# Altium PCB bob_breakout-layout.PcbDoc (part 2 of 2)
Units mil, origin at the board's own origin, x right, y up, seen from the top; angles counter-clockwise.
Board outline 6141.73 x 4531.01 mil, 4 copper layers (Top Copper, Signal Layer 1, Signal Layer 2, Bottom Copper), stack 61.811 mil thick; 106 components, 121 nets, 504 pads, 390 vias.
Unrouted connection lines stored in the file: 19.
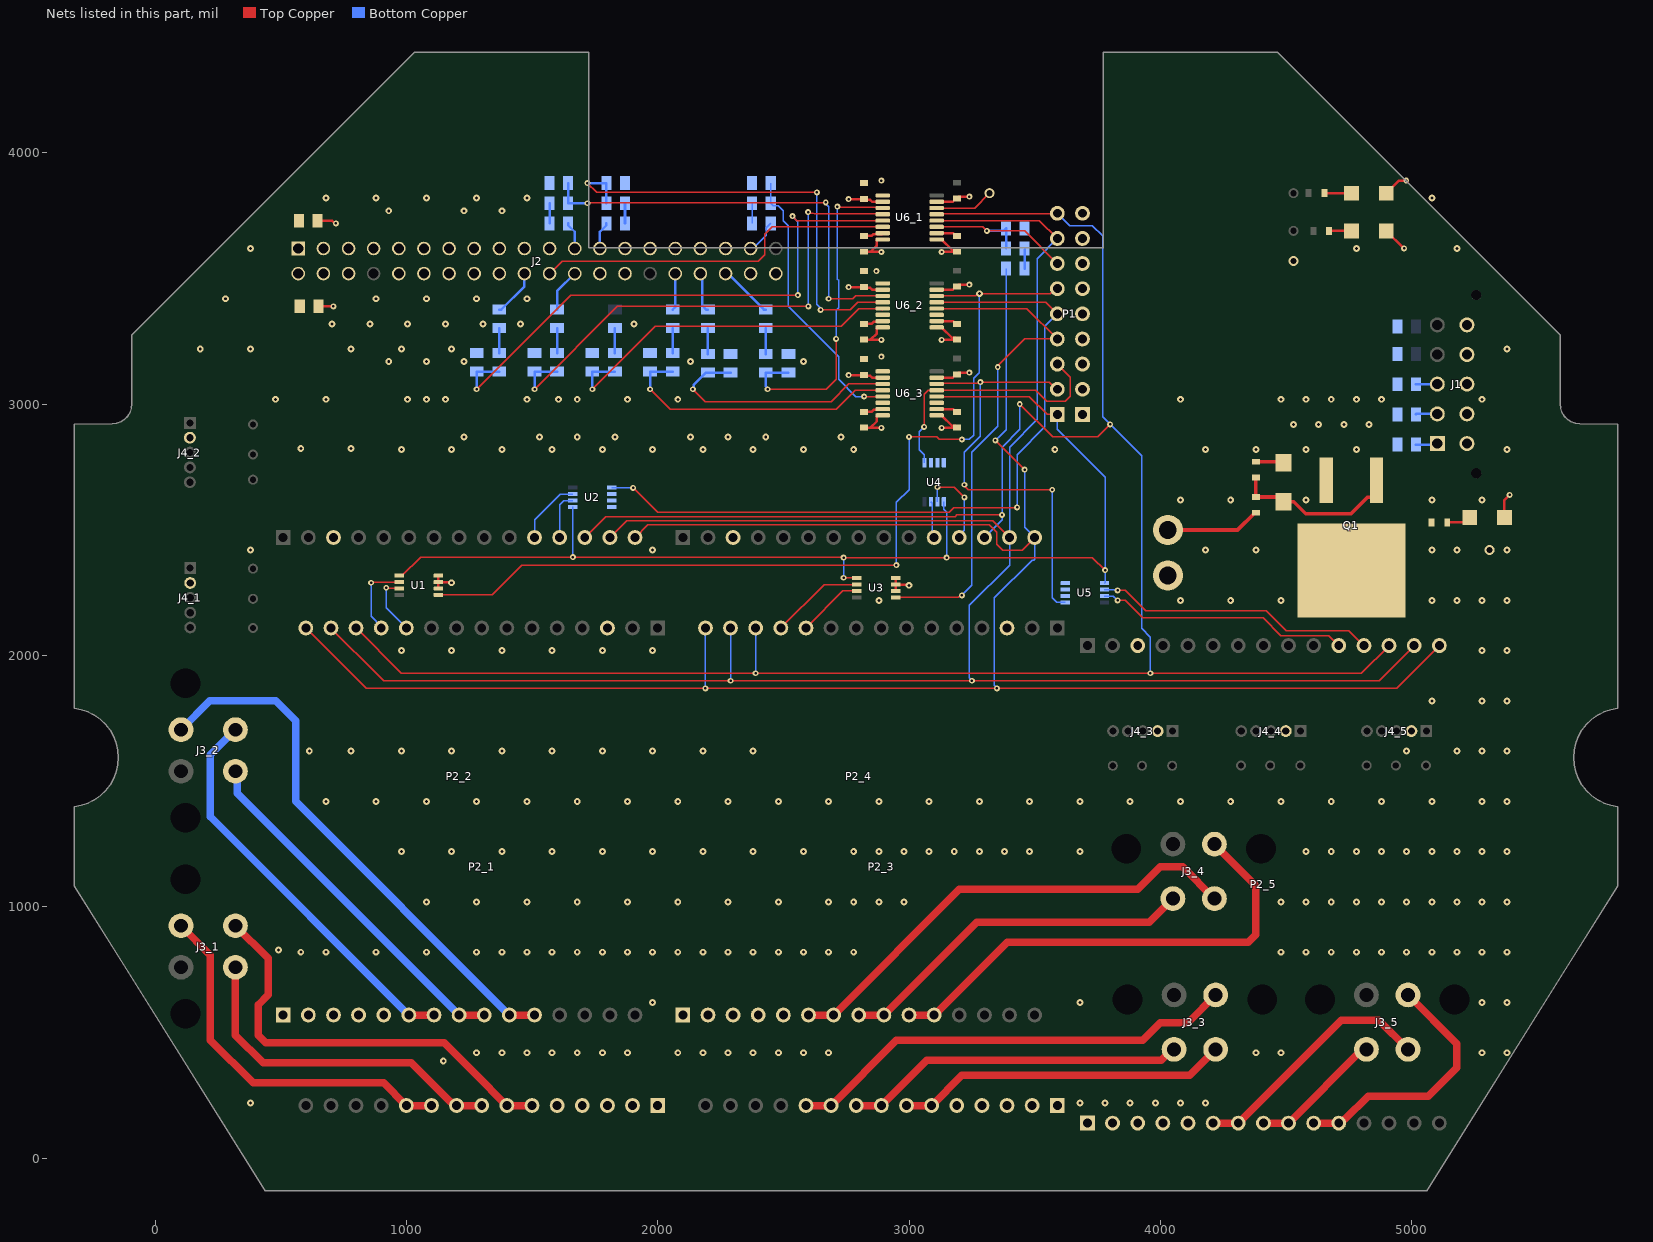
[diagram p4: the nets of this part, all layers, seen from the top]

## Via types
v1: diameter 27.56, hole 11.81, Top Copper to Bottom Copper, 156 vias
v2: diameter 27.56, hole 11.81, Top Copper to Bottom Copper, tented both sides, 141 vias
v3: diameter 23.62, hole 9.84, Top Copper to Bottom Copper, tented both sides, 93 vias

## Nets (pads, with @x,y where several pads share a name; then routed paths per layer and width w, separated by ;. In a path a pad name is that pad's centre, name@x,y a point inside that pad or via, vN(x,y) a via of type N, cw(c..) or ccw(c..) an arc to the next point about the centre after c; other vN are vias at no path point) (continued)
GND: C3.2 C4.2 C5.2 C6.2 C7.2 C9_1.1 C9_2.1 C9_3.1 D2.2 D3.2 D4.2 GND1.1 J1.6 J1.7 J1.8 J1.9 J1.10 J4_1.2 J4_2.2 J4_3.2 J4_4.2 J4_5.2 P1.2 P1.4 P1.6 P1.8 P1.10 P1.12 P1.14 P1.16 P1.18 P2_1.3 P2_1.18 P2_1.19 P2_1.20 P2_2.3 P2_2.18 P2_2.19 P2_2.20 P2_3.3 P2_3.18 P2_3.19 P2_3.20 P2_4.3 P2_4.18 P2_4.19 P2_4.20 P2_5.3 P2_5.18 P2_5.19 P2_5.20 R7_1.2 R7_2.2 R7_3.2 R10_4.2 S1.0 U1.2 U1.3 U1.4 U2.2 U2.3 U2.4 U3.2 U3.3 U3.4 U4.2 U4.3 U4.4 U5.2 U5.3 U5.4 U6_1.9 U6_1.15 U6_2.9 U6_2.15 U6_3.9 U6_3.15 | length 1408.7
  Top Copper w10: U1.2@1127.76,2267.2 U1.3@1127.76,2292.8 ; U1.4@1127.76,2318.39 U1.3@1127.76,2292.8 ; v2(1180,2290) 1178.6,2291.4 1129.15,2291.4 U1.3@1127.76,2292.8 ; U3.2@2947.76,2257.2 U3.3@2947.76,2282.8 ; U3.4@2947.76,2308.39 U3.3@2947.76,2282.8 ; v2(3000,2280) 2998.6,2281.4 2949.15,2281.4 U3.3@2947.76,2282.8 ; U6_3.9@3110,2956 3129.98,2956 3172.17,2913.82 3183.78,2913.82 R7_3.2@3190.59,2907.01 3190.09,2906.51 3130.5,2906.51 v3(3130,2906) ; U6_3.15@3110,3106 3174.15,3106 3186.65,3118.5 C9_3.1@3190.59,3118.5 3197.4,3125.31 3210.53,3125.31 3211.22,3126 v3(3240,3126) ; U6_2.9@3110,3306 3129.98,3306 3172.17,3263.82 3183.78,3263.82 R7_2.2@3190.59,3257.01 3190.09,3256.51 3130.5,3256.51 v3(3130,3256) ; U6_2.15@3110,3456 3174.15,3456 3186.65,3468.5 C9_2.1@3190.59,3468.5 3197.4,3475.31 3210.53,3475.31 3211.22,3476 v3(3240,3476) ; U6_1.9@3110,3656 3129.98,3656 3172.17,3613.82 3183.78,3613.82 R7_1.2@3190.59,3607.01 3190.09,3606.51 3130.5,3606.51 v3(3130,3606) ; U6_1.15@3110,3806 3174.15,3806 3186.65,3818.5 C9_1.1@3190.59,3818.5 3197.4,3825.31 3210.53,3825.31 3211.22,3826 v3(3240,3826) ; D3.2@4898.9,3690 4968.9,3620 v3(4970,3620) ; D2.2@4898.9,3840 4948.9,3890 v3(4978.4,3890) ; D4.2@5368.9,2550 5368.9,2618.9 v3(5390,2640)
  other v1: 1080,1020 1280,1020 1480,1020 1680,1020 1880,1020 2080,1020 2280,1020 2480,1020 980,1220 1180,1220 1380,1220 1580,1220 1780,1220 1980,1220 2180,1220 2380,1220 2580,1220 2780,1220 680,1420 880,1420 1080,1420 1280,1420 1480,1420 1680,1420 1880,1420 2080,1420 2280,1420 2480,1420 2680,1420 2880,1420 3080,1420 3280,1420 3480,1420 3680,1420 3880,1420 4080,1420 4280,1420 4480,1420 4680,1420 4880,1420 5080,1420 613.78,1620 780,1620 980,1620 1180,1620 1380,1620 1580,1620 1780,1620 1980,1620 2180,1620 2380,1620 4980,1620 5080,1820 980,2020 1180,2020 1380,2020 1580,2020 1780,2020 1980,2020 2880,2220 4080,2220 4280,2220 4480,2220 380,2420 1980,2420 4180,2420 4380,2420 4080,2620 4280,2620 980,2820 3580,2820 4180,2820 4380,2820 5380,2820 580,2824.28 780,2824.28 480,3020 680,3020 4080,3020 5280,3020 180,3220 380,3220 5380,3220 280,3420 380,3620 4780,3620 5180,3620 5080,3820
GPIO_PE6: J2.34 R8_9.2 | length 159.8
  Bottom Copper w10: J2.34@2170,3520 2177.5,3512.5 2177.5,3392 2192.5,3377 R8_9.2@2200,3377
GPIO_PZ0: J2.32 R8_8.2 | length 147.1
  Bottom Copper w10: R8_8.2@2060,3377 2070,3387 J2.32@2070,3520
I2C_1_SCL: J2.27
I2C_1_SDA: J2.28
I2C_2_SCL: J2.06
I2C_2_SDA: J2.04
I2S_4_LRCK: J2.36 R8_1.2 | length 219.2
  Bottom Copper w10: J2.36@2270,3520 2279.5,3520 2422.5,3377 R8_1.2@2430,3377
I2S_4_SCLK: J2.11
I2S_4_SDIN: J2.37 R8_10.2 | length 139
  Bottom Copper w5: J2.37@2370,3620 2380,3620 2432.5,3672.5 2432.5,3702.5 R8_10.2@2450,3720
JETSON_3V3: C2.1 C8_1.2 C8_2.2 C8_3.2 J2.02 J2.18 U6_1.1 U6_2.1 U6_3.1
  other v2: 1230,2870 1530,2870 1680,2870 1830,2870 2130,2870 2280,2870 2430,2870 2730,2870 1005,3020 1155,3020 1605,3020 930,3170 1080,3170 1230,3170 2130,3170 2580,3170 705,3320 855,3320 1005,3320 1155,3320 1305,3320 1455,3320 1905,3320 930,3770 1230,3770 1380,3770
  other v3: 2890,3190 2870,3530 2890,3890
JETSON_5V: C1.1 J2.01 J2.03
JETSON_GND: C1.2 C2.2 C8_1.1 C8_2.1 C8_3.1 J2.05 J2.10 J2.13 J2.19 J2.26 J2.29 J2.33 J2.40 R6_1.2 R6_2.2 R6_3.2 R10_1.2 R10_2.2 R10_3.2 R10_5.2 R10_6.2 R10_7.2 R10_8.2 R10_9.2 R10_10.2 U6_1.2 U6_1.8 U6_2.2 U6_2.8 U6_3.2 U6_3.8 | length 1088.4
  Top Copper w10: C1.2@647,3730 705.25,3730 715.25,3720 v3(720,3720) ; C2.2@650,3390 v3(710,3390) ; v3(2760,3116) 2760.5,3116.51 2820.09,3116.51 C8_3.1@2820.59,3117.01 2823.98,3113.61 2845.48,3113.61 2853.09,3106 U6_3.2@2895.43,3106 ; v3(2760,3466) 2760.5,3466.51 2820.09,3466.51 C8_2.1@2820.59,3467.01 2823.98,3463.61 2845.48,3463.61 2853.09,3456 U6_2.2@2895.43,3456 ; v3(2760,3816) 2760.5,3816.51 2820.09,3816.51 C8_1.1@2820.59,3817.01 2823.98,3813.61 2845.48,3813.61 2853.09,3806 U6_1.2@2895.43,3806 ; v3(2890,2906) 2889.5,2906.51 2821.09,2906.51 R6_3.2@2820.59,2907.01 2846.44,2907.01 2871.89,2932.46 2871.89,2952.44 2875.45,2956 U6_3.8@2895.43,2956 ; v3(2890,3256) 2889.5,3256.51 2821.09,3256.51 R6_2.2@2820.59,3257.01 2846.44,3257.01 2871.89,3282.46 2871.89,3302.44 2875.45,3306 U6_2.8@2895.43,3306 ; v3(2890,3606) 2889.5,3606.51 2821.09,3606.51 R6_1.2@2820.59,3607.01 2846.44,3607.01 2871.89,3632.46 2871.89,3652.44 2875.45,3656 U6_1.8@2895.43,3656
  other v2: 1180,2820 1380,2820 1580,2820 1780,2820 1980,2820 2180,2820 2380,2820 2580,2820 2780,2820 1080,3020 1480,3020 1680,3020 1880,3020 2080,3020 780,3220 980,3220 1180,3220 880,3420 1080,3420 1280,3420 1480,3420 680,3820 880,3820 1080,3820 1280,3820 1480,3820
LCD_BL_PWM: J2.31
LCD_TE: J2.16
NetD1_2: D1.2 Q1.1 R1.2 R2.1 | length 667.1
  Top Copper w15: R1.2@4380,2708.5 R2.1@4380,2631.5 4470.89,2631.5 D1.2@4490,2612.38 4530.78,2612.38 4578.49,2564.67 4758.81,2564.67 4824.28,2630.14 4838.43,2630.14 4860,2651.72 Q1.1@4860,2698.03
NetD2_1: D2.1 R3.1 | length 108.1
  Top Copper w10: R3.1@4652.99,3840 D2.1@4761.1,3840
NetD3_1: D3.1 R4.1 | length 89.6
  Top Copper w10: R4.1@4671.5,3690 D3.1@4761.1,3690
NetD4_1: D4.1 R5.1 | length 97.9
  Top Copper w10: R5.1@5141.5,2530 5211.1,2530 D4.1@5231.1,2550
NetR2_2: R2.2 S1.1 | length 378.4
  Top Copper w10: R2.2@4376.06,2568.5 R2.2@4380,2568.5
  Top Copper w15: S1.1@4030,2500 4307.56,2500 R2.2@4376.06,2568.5
NetR6_1_1: R6_1.1 U6_1.7 | length 79.4
  Top Copper w10: R6_1.1@2820.59,3670 2851.34,3670 2858.91,3677.57 2892,3677.57 U6_1.7@2895.43,3681
NetR6_2_1: R6_2.1 U6_2.7 | length 79.4
  Top Copper w10: R6_2.1@2820.59,3320 2851.34,3320 2858.91,3327.57 2892,3327.57 U6_2.7@2895.43,3331
NetR6_3_1: R6_3.1 U6_3.7 | length 79.4
  Top Copper w10: R6_3.1@2820.59,2970 2851.34,2970 2858.91,2977.57 2892,2977.57 U6_3.7@2895.43,2981
NetR7_1_1: R7_1.1 U6_1.10 | length 85.1
  Top Copper w10: U6_1.10@3110,3681 3175.65,3681 3186.65,3670 R7_1.1@3190.59,3670
NetR7_2_1: R7_2.1 U6_2.10 | length 85.1
  Top Copper w10: U6_2.10@3110,3331 3175.65,3331 3186.65,3320 R7_2.1@3190.59,3320
NetR7_3_1: R7_3.1 U6_3.10 | length 85.1
  Top Copper w10: U6_3.10@3110,2981 3175.65,2981 3186.65,2970 R7_3.1@3190.59,2970
NetR8_1_1: R8_1.1 R9_1.2 | length 103
  Bottom Copper w10: R9_1.2@2430,3200 R8_1.1@2430,3303
NetR8_2_1: R8_2.1 R9_2.2 | length 99
  Bottom Copper w10: R9_2.2@1600,3204 R8_2.1@1600,3303
NetR8_3_1: R8_3.1 R9_3.2 | length 99
  Bottom Copper w10: R9_3.2@1370,3204 R8_3.1@1370,3303
NetR8_4_1: R8_4.1 R9_4.2 | length 80
  Bottom Copper w10: R8_4.1@3460,3540 R9_4.2@3460,3620
NetR8_5_1: R8_5.1 R9_5.2 | length 80
  Bottom Copper w10: R8_5.1@1570,3720 R9_5.2@1570,3800
NetR8_6_1: R8_6.1 R9_6.2 | length 80
  Bottom Copper w10: R8_6.1@1870,3720 R9_6.2@1870,3800
NetR8_7_1: R8_7.1 R9_7.2 | length 99
  Bottom Copper w10: R9_7.2@1830,3204 R8_7.1@1830,3303
NetR8_8_1: R8_8.1 R9_8.2 | length 99
  Bottom Copper w10: R9_8.2@2060,3204 R8_8.1@2060,3303
NetR8_9_1: R8_9.1 R9_9.2 | length 103
  Bottom Copper w10: R9_9.2@2200,3200 R8_9.1@2200,3303
NetR8_10_1: R8_10.1 R9_10.2 | length 80
  Bottom Copper w5: R8_10.1@2376,3720 R9_10.2@2376,3800
NetU6_2_6: U6_2.6
NetU6_2_11: U6_2.11
NetU6_3_6: U6_3.6
NetU6_3_11: U6_3.11
SPI_1_CS0: J2.23 R8_5.2 | length 110.8
  Bottom Copper w10: R8_5.2@1644,3720 1644,3712.5 1670,3686.5 J2.23@1670,3620
SPI_1_CS0_CTRL: P2_1.11 U1.7 | length 246.5
  Top Copper w5: v3(920,2270) 921.4,2268.6 970.85,2268.6 U1.7@972.24,2267.2
  Bottom Copper w5: v3(920,2270) 920,2190 P2_1.11@1000,2110
SPI_1_CS0_DRV: P2_1.12 U1.6 | length 304.2
  Top Copper w5: v3(860,2290) 862.31,2292.31 971.76,2292.31 U1.6@972.24,2292.8
  Bottom Copper w5: v3(860,2290) 860,2155.79 P2_1.12@900,2115.79
SPI_1_CS0_FILTER: R9_5.1 R10_5.1 U6_2.3 | length 1716.4
  Top Copper w5: v3(1720,3800) 1721.84,3801.84 2666.94,3801.84 v3(2668.78,3803.69) ; v3(2680,3420) 2776.95,3420 2787.96,3431 U6_2.3@2895.43,3431
  Top Copper w10: U6_2.3@2894.18,3429.75 U6_2.3@2895.43,3431
  Bottom Copper w5: v3(2668.78,3803.69) 2668.78,3797.59 2680,3786.37 v3(2680,3420)
  Bottom Copper w10: R10_5.1@1644,3880 R9_5.1@1644,3800 v3(1720,3800)
SPI_1_CS0_ISO: P1.11 U1.1 U6_2.14 | length 3734.7
  Top Copper w5: U1.1@1127.76,2241.61 1341.61,2241.61 1460,2360 v3(2950,2360) ; v3(3000,2870) 3110,2870 3120,2860 v3(3210,2860) ; U6_2.14@3110,3431 3264.9,3431 3273.9,3440 v2(3280,3440) 3561.78,3440 3581.78,3460 P1.11@3590,3460
  Bottom Copper w5: v3(2950,2360) 2950,2610 3000,2660 v3(3000,2870) ; v3(3210,2860) 3240,2860 3257.35,2877.35 3257.35,3103.43 3280,3126.07 v2(3280,3440)
SPI_1_CS1: J2.25 R8_6.2 | length 110.8
  Bottom Copper w10: J2.25@1770,3620 1770,3686.5 1796,3712.5 R8_6.2@1796,3720
SPI_1_CS1_CTRL: P2_2.11 U2.7 | length 264.8
  Bottom Copper w5: P2_2.11@1510,2470 1510,2540 1612.8,2642.8 U2.7@1662.24,2642.8
SPI_1_CS1_DRV: P2_2.12 U2.6 | length 189.4
  Bottom Copper w5: P2_2.12@1610,2470 1610,2600 1627.2,2617.2 U2.6@1662.24,2617.2
SPI_1_CS1_FILTER: R9_6.1 R10_6.1 U6_2.4 | length 1819
  Top Copper w5: v3(1720,3880) 1756.71,3843.29 v3(2633.41,3843.29) ; v3(2648.22,3375.67) 2765.67,3375.67 2796,3406 U6_2.4@2895.43,3406
  Bottom Copper w5: v3(2633.41,3843.29) 2632.34,3842.21 2632.34,3397.66 2648.22,3381.77 v3(2648.22,3375.67)
  Bottom Copper w10: v3(1720,3880) R10_6.1@1796,3880 R9_6.1@1796,3800
SPI_1_CS1_ISO: P1.9 U2.1 U6_2.13 | length 2996.6
  Top Copper w5: v3(1902.67,2667.33) 2000,2570 3160,2570 3177.51,2587.52 3427.51,2587.52 v3(3430,2590) ; U6_2.13@3110,3406 3544,3406 P1.9@3590,3360
  Bottom Copper w5: U2.1@1817.76,2668.39 1818.28,2667.86 1902.14,2667.86 v3(1902.67,2667.33) ; v3(3430,2590) 3430,2800 3540,2910 3540,3310 P1.9@3590,3360
SPI_1_CS2_CTRL: P2_3.11 U3.7 | length 260.9
  Top Copper w5: P2_3.11@2595.68,2110 2595.68,2115.68 2737.2,2257.2 U3.7@2792.24,2257.2
SPI_1_CS2_DRV: P2_3.12 U3.6 | length 373.8
  Top Copper w5: P2_3.12@2490,2110 2662.8,2282.8 U3.6@2792.24,2282.8
SPI_1_CS2_FILTER: R9_7.1 R10_7.1 U6_2.5 | length 1451.9
  Top Copper w5: v3(1740,3060) 1990,3310 2730,3310 2801,3381 U6_2.5@2895.43,3381
  Top Copper w10: U6_2.5@2892.93,3378.5 U6_2.5@2895.43,3381
  Bottom Copper w10: v3(1740,3060) R10_7.1@1740,3130 R9_7.1@1830,3130
SPI_1_CS2_ISO: P1.7 U3.1 U6_2.12 | length 2049.4
  Top Copper w5: U3.1@2947.76,2231.61 3196.58,2231.61 3204.96,2240 v3(3210,2240) ; U6_2.12@3110,3381 3469,3381 P1.7@3590,3260 3460,3260 3352.95,3152.95 v3(3352.95,3147.64)
  Bottom Copper w5: v3(3210,2240) 3250,2280 3250,2810 3352.95,2912.95 v3(3352.95,3147.64)
SPI_1_CS3_CTRL: P2_4.11 U4.7 | length 147.5
  Bottom Copper w5: U4.7@3087.2,2612.24 3092.97,2606.48 3092.97,2477.03 P2_4.11@3100,2470
SPI_1_CS3_DRV: P2_4.12 U4.6 | length 349.8
  Top Copper w5: v3(3112.8,2670) 3180,2670 v3(3220,2630)
  Bottom Copper w5: U4.6@3112.8,2612.24 v3(3112.8,2670) ; P2_4.12@3200,2470 3200,2478.22 3220,2498.22 v3(3220,2630)
SPI_1_CS3_FILTER: R9_8.1 R10_8.1 U6_3.4 | length 1150.1
  Top Copper w5: v3(1970,3060) 2050,2980 2710,2980 2786,3056 U6_3.4@2895.43,3056
  Bottom Copper w10: v3(1970,3060) R10_8.1@1970,3130 R9_8.1@2060,3130
SPI_1_CS3_ISO: P1.5 U4.1 U6_3.13 | length 1052.6
  Top Copper w5: v3(3060,2910) 3060,3040 3076,3056 U6_3.13@3110,3056 3504,3056 3547.2,3012.8 3622.04,3012.8 3641.42,3032.19 3641.42,3108.58 P1.5@3590,3160
  Bottom Copper w5: v3(3060,2910) 3040,2890 3040,2820 3061.61,2798.39 U4.1@3061.61,2767.76
SPI_1_CS4_CTRL: P2_5.11 U5.7 | length 1013.9
  Top Copper w5: v3(3830,2220) 3860,2220 3930,2150 4410,2150 4480,2080 4508.51,2080 cw(c4510,2040) 4511.49,2080 4608.51,2080 cw(c4610,2040) 4611.49,2080 4670,2080 P2_5.11@4710,2040
  Bottom Copper w5: U5.7@3777.76,2237.2 3812.8,2237.2 v3(3830,2220)
SPI_1_CS4_DRV: P2_5.12 U5.6 | length 1124.5
  Top Copper w5: v3(3830,2260) 3860,2260 3941.72,2178.28 4421.72,2178.28 4500,2100 4750,2100 P2_5.12@4810,2040
  Bottom Copper w5: U5.6@3777.76,2262.8 3779.15,2261.4 3828.6,2261.4 v3(3830,2260)
SPI_1_CS4_FILTER: R9_9.1 R10_9.1 U6_3.3 | length 992.6
  Top Copper w5: v3(2140,3060) 2190,3010 2690,3010 2761,3081 U6_3.3@2895.43,3081
  Top Copper w10: U6_3.3@2894.18,3079.75 U6_3.3@2895.43,3081
  Bottom Copper w10: v3(2140,3060) 2143.36,3063.36 2143.36,3076.86 2192.5,3126 R10_9.1@2290,3126
SPI_1_CS4_ISO: P1.3 U5.1 U6_3.14 | length 1780.6
  Top Copper w5: U6_3.14@3110,3081 3113.65,3084.66 3280.05,3084.66 v3(3283.71,3088.31) 3557.32,3088.31 3585.63,3060 P1.3@3590,3060 ; v3(3220,2680) 3220,2674.96 3234.96,2660 v3(3570,2660)
  Bottom Copper w5: v3(3220,2680) 3220,2810 3283.71,2873.71 v3(3283.71,3088.31) ; v3(3570,2660) 3570,2230 3588.39,2211.61 U5.1@3622.24,2211.61
SPI_1_CS5_FILTER: R9_1.1 R10_1.1 U6_1.3 | length 1325.8
  Top Copper w5: v3(2437.8,3060) 2670,3060 2710,3100 v3(2710,3260) ; v3(2714.92,3786.39) 2717.61,3783.7 2890.24,3783.7 U6_1.3@2894.18,3779.75
  Top Copper w10: U6_1.3@2894.18,3779.75 U6_1.3@2895.43,3781
  Bottom Copper w5: R10_1.1@2520,3126 R10_1.1@2521,3125 ; v3(2710,3260) 2710,3374.35 2720,3384.35 2720,3492.6 2714.92,3497.68 v3(2714.92,3786.39)
  Bottom Copper w10: v3(2437.8,3060) 2437.8,3064.75 2430,3072.56 R9_1.1@2430,3126 R10_1.1@2520,3126
SPI_1_CS5_ISO: CS5.1 U6_1.14 | length 234.4
  Top Copper w5: U6_1.14@3110,3781 3261,3781 CS5.1@3320,3840
SPI_1_MISO: J2.22 U6_1.6 | length 1449.3
  Top Copper w5: J2.22@1570,3520 1620,3570 2400,3570 2425.94,3595.94 2425.94,3604.08 2425.94,3675.94 2456,3706 U6_1.6@2895.43,3706
SPI_1_MISO_FILTER: P1.13 R9_4.1 R10_4.1 U6_1.11 | length 700.6
  Top Copper w5: U6_1.11@3110,3706 3294,3706 v3(3310,3690) 3460,3690 P1.13@3590,3560
  Bottom Copper w10: v3(3310,3690) 3376,3690 R10_4.1@3386,3700 R9_4.1@3386,3620
SPI_1_MISO_ISO: P2_1.15 P2_2.15 P2_3.15 P2_4.15 P2_5.15 R8_4.2 | length 8474
  Top Copper w5: P2_1.15@600,2110 840,1870 4940,1870 P2_5.15@5110,2040 ; P2_2.15@1910,2470 1960,2520 3320.17,2520 3350,2490.17 3350,2443.39 3373.39,2420 3450,2420 P2_4.15@3500,2470 ; v3(3343.8,2856.49) 3343.8,2856.35 3460,2740.15 v3(3460,2740)
  Bottom Copper w5: P2_3.15@2170.77,2129.23 P2_3.15@2190,2110 v3(2190,1870) ; v3(3343.8,2856.49) 3360.34,2873.03 3386,2898.69 R8_4.2@3386,3540 ; v3(3350,1870) 3350,1872.24 3340,1882.24 3340,2230 3490,2380 3497.07,2380 3500,2382.93 P2_4.15@3500,2470 3460,2510 v3(3460,2740)
SPI_1_MOSI: J2.20 R8_3.2 | length 188.8
  Bottom Copper w10: R8_3.2@1370,3377 1377.5,3377 1470,3469.5 J2.20@1470,3520
SPI_1_MOSI_FILTER: R9_3.1 R10_3.1 U6_1.5 | length 2282.9
  Top Copper w5: v3(1280,3060) 1654.33,3434.33 v3(2558.22,3434.33) ; v3(2536.44,3748.66) 2554.1,3731 U6_1.5@2895.43,3731
  Bottom Copper w5: v3(2536.44,3748.66) 2558.22,3726.88 v3(2558.22,3434.33)
  Bottom Copper w10: v3(1280,3060) R10_3.1@1280,3130 R9_3.1@1370,3130
SPI_1_MOSI_ISO: P1.15 P2_1.14 P2_2.14 P2_3.14 P2_4.14 P2_5.14 U6_1.12 | length 8757
  Top Copper w5: P2_1.14@682.32,2127.68 910,1900 4870,1900 P2_5.14@5010,2040 ; P2_2.14@1810,2470 1877.12,2537.12 3332.88,2537.12 P2_4.14@3400,2470 ; U6_1.12@3110,3731 3519,3731 P1.15@3590,3660
  Bottom Copper w5: v3(2290,1900) P2_3.14@2290,2112.9 ; v3(3250,1900) 3250,1902.24 3240,1912.24 3240,2200 3400,2360 P2_4.14@3400,2470 3400,2830 3510,2940 3510,3580 P1.15@3590,3660
SPI_1_MUX_SEL_FILTER: R9_10.1 R10_10.1 U6_3.5 | length 1107.6
  Top Copper w5: v3(2821,3031) U6_3.5@2895.43,3031
  Bottom Copper w5: R10_10.1@2450,3880 R9_10.1@2450,3800 2460,3790 2480,3790 2500,3770 2500,3730 2520,3710 2520,3390 2720,3190 2720,3100 2789,3031 v3(2821,3031)
SPI_1_MUX_SEL_ISO: P1.1 U1.5 U2.5 U3.5 U4.5 U5.5 U6_3.12 | length 4680
  Top Copper w5: U1.5@972.24,2318.39 982.68,2318.39 1056.54,2392.24 v3(1662.24,2392.24) 1663.37,2391.12 2738.88,2391.12 v3(2740,2390) v3(3150,2390) 3730,2390 v3(3780,2340) ; v3(2740,2310) 2740.81,2309.19 2791.44,2309.19 U3.5@2792.24,2308.39 ; U6_3.12@3110,3031 3479,3031 3550,2960 P1.1@3590,2960
  Bottom Copper w5: v3(1662.24,2392.24) U2.5@1662.24,2591.61 ; v3(2740,2310) v3(2740,2390) ; U4.5@3138.39,2612.24 3138.39,2581.61 3150,2570 v3(3150,2390) ; P1.1@3590,2960 3590,2900 3780,2710 v3(3780,2340) 3780,2290.63 U5.5@3777.76,2288.39
SPI_1_SCK: J2.24 R8_2.2 | length 172
  Bottom Copper w10: R8_2.2@1600,3377 1600,3450 J2.24@1670,3520
SPI_1_SCK_FILTER: R9_2.1 R10_2.1 U6_1.4 | length 2062.9
  Top Copper w5: v3(1510,3060) 1840,3390 v3(2600,3390) ; v3(2598.43,3764.86) 2602.74,3760.54 2619.66,3760.54 2622.21,3758 2893.44,3758 U6_1.4@2895.43,3756
  Bottom Copper w5: v3(2598.43,3764.86) 2599.21,3764.07 2599.21,3390.79 v3(2600,3390)
  Bottom Copper w10: v3(1510,3060) R10_2.1@1510,3130 R9_2.1@1600,3130
SPI_1_SCK_ISO: P1.17 P2_1.13 P2_2.13 P2_3.13 P2_4.13 P2_5.13 U6_1.13 | length 9648.3
  Top Copper w5: P2_1.13@800,2110 980,1930 4800,1930 P2_5.13@4910,2040 ; P2_2.13@1710,2470 1793,2553 3183,2553 3190,2560 v3(3370,2560) ; U6_1.13@3110,3756 3112,3758 3588,3758 P1.17@3590,3760 ; v3(3440.63,3000.78) 3571.42,2870 3750,2870 v3(3800,2920)
  Bottom Copper w5: v3(2390,1930) P2_3.13@2390,2110 ; P2_4.13@3300,2470 3370,2540 v3(3370,2560) 3370,2830 3440.63,2900.63 v3(3440.63,3000.78) ; P1.17@3590,3760 3640,3710 3730,3710 3770,3670 3770,2950 v3(3800,2920) 3925.67,2794.33 3925.67,2108.22 3960,2073.89 v3(3960,1930)
SPI_2_CS0: J2.17
SPI_2_CS1: J2.15
SPI_2_MISO: J2.21
SPI_2_MOSI: J2.38
SPI_2_SCK: J2.14
U_1: J3_1.1 P2_1.21 P2_1.22 | length 1720.6
  Top Copper w30: J3_1.1@320,925.35 450,795.35 450,650 410,610 410,490 440,460 1150,460 1272.22,337.78 1398.11,211.89 P2_1.22@1409.61,211.89 ; P2_1.22@1400,210 P2_1.21@1500,210
U_2: J3_2.1 P2_2.21 P2_2.22 | length 1604
  Top Copper w30: P2_2.21@1010,570 P2_2.22@1110,570
  Bottom Copper w30: J3_2.1@320,1705.35 220,1605.35 220,1360 P2_2.21@1010,570
U_3: J3_3.1 P2_3.21 P2_3.22 | length 1322.6
  Top Copper w30: P2_3.22@2990,210 P2_3.21@3090,210 3210,330 4116.54,330 J3_3.1@4220,433.46
U_4: J3_4.1 P2_4.21 P2_4.22 | length 1912.2
  Top Copper w30: P2_4.21@2600,570 P2_4.22@2700,570 3200,1070 3910,1070 4000,1160 4088.82,1160 J3_4.1@4215.35,1033.46
U_5: J3_5.1 P2_5.21 P2_5.22 | length 993.5
  Top Copper w30: P2_5.21@4210,140 P2_5.22@4310,140 4720,550 4868.82,550 J3_5.1@4985.35,433.46
UART_2_CTS: J2.35
UART_2_RTS: J2.12
UART_2_RX: J2.09
UART_2_TX: J2.07
V_1: J3_1.2 P2_1.23 P2_1.24 | length 1374.8
  Top Copper w30: J3_1.2@320,760 320,490 430,380 1020,380 1175.47,224.53 1177.61,224.53 1190.25,211.89 P2_1.24@1209.61,211.89 ; P2_1.24@1200,210 P2_1.23@1300,210
V_2: J3_2.2 P2_2.23 P2_2.24 | length 1438.7
  Top Copper w30: P2_2.23@1210,570 P2_2.24@1310,570
  Bottom Copper w30: J3_2.2@320,1540 327.09,1532.91 327.09,1452.91 P2_2.23@1210,570
V_3: J3_3.2 P2_3.23 P2_3.24 | length 1338.9
  Top Copper w30: P2_3.24@2790,210 P2_3.23@2871.67,210 ; P2_3.23@2890,210 3070,390 4002.86,390 4046.32,433.46 J3_3.2@4054.65,433.46
V_4: J3_4.2 P2_4.23 P2_4.24 | length 1442
  Top Copper w30: P2_4.23@2800,570 P2_4.24@2900,570 2942.7,612.7 3270,940 3956.54,940 J3_4.2@4050,1033.46
V_5: J3_5.2 P2_5.23 P2_5.24 | length 531.6
  Top Copper w30: P2_5.23@4410,140 P2_5.24@4510,140 4803.46,433.46 J3_5.2@4820,433.46
VCC: P2_1.16 P2_1.17 P2_2.16 P2_2.17 P2_3.16 P2_3.17 P2_4.16 P2_4.17 P2_5.16 P2_5.17 Q1.2 R5.2 VCC1.1
  other v1: 3680,220 3880,220 4080,220 1146.97,386.97 1380,420 1580,420 1780,420 2180,420 2380,420 2580,420 4380,420 5380,420 3680,620 5280,620 580,820 1380,820 1580,820 1780,820 1980,820 2180,820 2380,820 2580,820 2780,820 4580,820 4780,820 4980,820 5180,820 5380,820 2680,1020 2880,1020 4480,1020 4680,1020 4880,1020 5080,1020 5280,1020 2980,1220 3180,1220 3380,1220 4580,1220 4780,1220 4980,1220 5180,1220 5380,1220 5280,1420 5180,1620 5380,1620 5280,1820 5380,2020 5080,2220 5280,2220 5180,2420 5380,2420 5080,2620 5280,2620
  other v2: 380,220 3780,220 3980,220 4180,220 1280,420 1480,420 1680,420 1880,420 2080,420 2280,420 2480,420 2680,420 4480,420 5280,420 1980,620 5380,620 680,820 880,820 1080,820 1280,820 1480,820 1680,820 1880,820 2080,820 2280,820 2480,820 2680,820 4480,820 4680,820 4880,820 5080,820 5280,820 491.55,829.49 2780,1020 2980,1020 4580,1020 4780,1020 4980,1020 5180,1020 5380,1020 2880,1220 3080,1220 3280,1220 3480,1220 3680,1220 4680,1220 4880,1220 5080,1220 5280,1220 5380,1420 5280,1620 5380,1820 5280,2020 5180,2220 5380,2220 5080,2420
VCC_CONN: C5.1 C6.1 C7.1 D1.1 J1.1 J1.2 J1.3 Q1.3 R1.1 | length 368.6
  Top Copper w10: D1.1@4486.12,2771.5 D1.1@4490,2767.62
  Top Copper w15: R1.1@4380,2771.5 D1.1@4486.12,2771.5
  Bottom Copper w10: C7.1@5017,2840 5098.11,2840 J1.1@5101.89,2843.78 ; C6.1@5017,2960 5018.89,2961.89 J1.2@5101.89,2961.89 ; C5.1@5017,3080 J1.3@5101.89,3080
  other v2: 4580,2620 4580,2820 4780,2820 4530,2920 4630,2920 4730,2920 4830,2920 4480,3020 4580,3020 4680,3020 4780,3020 4880,3020
W_1: J3_1.3 P2_1.25 P2_1.26 | length 1488.6
  Top Copper w30: J3_1.3@103.46,925.35 220,808.82 220,470 390,300 910,300 P2_1.26@998.11,211.89 ; P2_1.26@1000,210 P2_1.25@1100,210
W_2: J3_2.3 P2_2.25 P2_2.26 | length 2159.2
  Top Copper w30: P2_2.25@1410,570 P2_2.26@1510,570
  Bottom Copper w30: J3_2.3@103.46,1705.35 218.11,1820 480,1820 560,1740 560,1420 P2_2.25@1410,570
W_3: J3_3.3 P2_3.25 P2_3.26 | length 1812.3
  Top Copper w30: P2_3.26@2590,210 P2_3.25@2690,210 2950,470 3930,470 4000,540 4110,540 J3_3.3@4220,650
W_4: J3_4.3 P2_4.25 P2_4.26 | length 1940.7
  Top Copper w30: P2_4.25@3000,570 P2_4.26@3100,570 3390,860 4350,860 4380,890 4380,1085.35 J3_4.3@4215.35,1250
W_5: J3_5.3 P2_5.25 P2_5.26 | length 1031.8
  Top Copper w30: P2_5.25@4610,140 4717.86,140 4732.39,154.53 4734.53,154.53 4826.79,246.79 5066.79,246.79 5180,360 5180,455.35 J3_5.3@4985.35,650
pads on no net: J1.M1 J1.M2 J3_1.4 J3_1.MH1 J3_2.4 J3_2.MH1 J3_3.4 J3_3.MH1 J3_4.4 J3_4.MH1 J3_5.4 J3_5.MH1 P2_1.4 P2_1.8 P2_1.9 P2_1.10 P2_1.27 P2_1.28 P2_1.29 P2_2.4 P2_2.8 P2_2.9 P2_2.10 P2_2.27 P2_2.28 P2_2.29 P2_3.4 P2_3.8 P2_3.9 P2_3.10 P2_3.27 P2_3.28 P2_3.29 P2_4.4 P2_4.8 P2_4.9 P2_4.10 P2_4.27 P2_4.28 P2_4.29 P2_5.4 P2_5.8 P2_5.9 P2_5.10 P2_5.27 P2_5.28 P2_5.29
copper on no net:
  other v2: 1660,2020 3150,2020

## Polygon pours and split planes (outlines as drawn)
GND on Bottom Copper "GND" (solid, remove dead copper, pour order 64): 2970,3935 500,3935 0,3935 0,0 5510,0 5510,3935
JETSON_GND on Bottom Copper "JETSON_GND" (solid, remove dead copper, pour order 63): 509.96,3935 509.96,3290 670,3290 1210,2750 2980,2750 2980,3935
VCC on Signal Layer 1 "Signal Layer 1-VCC" (solid, remove dead copper, pour order 62): 5600,2710 4810,2710 4810,2110 5171.44,2110 5169.86,1410 3660,1410 3550,1300 2875,1300 2515,940 0,940 0,0 5550,0 5630,80 5600,110
5V on Signal Layer 1 "Signal Layer 1-5V" (solid, remove dead copper, pour order 57): 3550,1980 3746.06,1980 3746.06,2406.06 4470,3130 5180,3130 5180,3250 4320,3250 3430,2360 2140,2360 2140,2529.06 2030,2529.06 2030,2360 545.67,2360 545.67,2529.06 430,2529.06 430,2210 1960,2210 1960,2050 2070,2050 2070,2210 3550,2210
3V3 on Signal Layer 1 "Signal Layer 1-3V3" (solid, remove dead copper, pour order 60): 70,2020 260,2020 640,1640 4950,1640 4950,1860 3855.82,1860 3855.82,2088.11 3774.52,2088.11 3774.52,1860 3540,1860 3540,2158.11 3440,2158.11 3440,1860 1950,1860 1950,2160 1850,2160 1850,1860 640,1860 360,2140 360,2570 572.13,2570 572.13,2421.89 656.97,2421.89 656.97,2570 2165.02,2570 2165.02,2421.89 2246.97,2421.89 2246.97,2570 3600,2570 4301.09,3271.09 5180,3271.09 5180,3450 4510,3450 4510,3810 5200,3810 5200,3935 3020,3935 3020,2710 360,2710 360,3050 70,3050
JETSON_5V on Signal Layer 1 "Signal Layer 1-JETSON_5V" (solid, remove dead copper, pour order 68): 509.96,3590 509.96,3830 720,3830 720,3590
JETSON_3V3 on Signal Layer 1 "Signal Layer 1-JETSON_3V3" (solid, pour order 67): 810,3935 810,3550 510,3550 510,3290 670,3290 1210,2750 2980,2750 2980,3935
VCC_CONN on Signal Layer 1 "Signal Layer 1-VCC_CONN" (solid, remove dead copper, pour order 61): 5180,3110 5180,2770 4710,2770 4710,2580 4430,2580 4430,3110
VCC on Top Copper "VCC" (solid, remove dead copper, pour order 59): 5600,2710 4930,2710 4930,2560 4810,2560 4810,2099.06 5171.42,2099.06 5169.86,1410 3660,1410 3550,1300 2875,1300 2515,940 0,940 0,0 5550,0 5630,80 5600,110
JETSON_5V on Top Copper "JETSON_5V" (solid, remove dead copper, pour order 56): 509.96,3590 509.96,3830 720,3830 720,3590
JETSON_3V3 on Top Copper "JETSON_3V3" (solid, pour order 55): 810,3935 810,3550 510,3550 510,3290 670,3290 1210,2750 2980,2750 2980,3935
3V3 on Top Copper "3V3" (solid, remove dead copper, pour order 65): 3020,2710 3740,2710 4301.09,3271.09 5180,3271.09 5180,3450 4510,3450 4510,3810 5200,3810 5200,3935 3020,3935
VCC_CONN on Top Copper "VCC_CONN" (solid, remove dead copper, pour order 58): 4476.71,3109.65 5180,3109.96 5180,2770 4710,2770 4710,2580 4430,2580 4430,3062.94
GND on Signal Layer 2 "Signal Layer 2-GND" (solid, remove dead copper, pour order 54): 2970,3935 500,3935 0,3935 0,0 5510,0 5510,3935
JETSON_GND on Signal Layer 2 "Signal Layer 2-JETSON_GND" (solid, remove dead copper, pour order 53): 509.96,3935 509.96,3290 670,3290 1210,2750 2980,2750 2980,3935

## Other copper
Top Copper:
  pour cut-out: 3560,2190 3560,2040 2030,2040 2030,2190
  pour cut-out: 3650,2110 3650,1970 5171.42,1970 5171.42,2110

## Silkscreen, mask and mechanical layers (free items; w line width, h text height)
Top Overlay:
  drawing of 12 lines, arcs and shapes, not listed
  text "J_5V" at 566,3841 h30
  text "SCK" at 3408,3738 h30
  text "CS0" at 1690,3690 h30 r90
  text "CS1" at 1790,3690 h30 r90
  text "J_GND" at 790,3680 h30 r90
  text "J_GND" at 1190,3680 h30 r90
  text "J_GND" at 1490,3680 h30 r90
  text "J_GND" at 1990,3680 h30 r90
  text "J_GND" at 2190,3680 h30 r90
  text "CTRL_EN" at 2490,3680 h30 r90
  text "MOSI" at 3410,3640 h30
  text "MISO" at 3410,3540 h30
  text "CS0" at 3410,3440 h30
  text "CS1" at 3410,3340 h30
  text "J_3V3" at 529,3306 h30 r90
  text "J_GND" at 1000,3300 h30 r90
  text "J_3V3" at 1400,3300 h30 r90
  text "MOSI" at 1500,3300 h30 r90
  text "MISO" at 1600,3300 h30 r90
  text "SCK" at 1700,3300 h30 r90
  text "J_GND" at 1800,3300 h30 r90
  text "CS2" at 2000,3300 h30 r90
  text "CS3" at 2100,3300 h30 r90
  text "CS4" at 2200,3300 h30 r90
  text "J_GND" at 2500,3300 h30 r90
  text "CS2" at 3410,3240 h30
  text "CS3" at 3410,3140 h30
  text "CS4" at 3410,3040 h30
  text "CS_DRV" at 3340,2940 h30
  text "------------GND---------------" at 3800,2900 h30 r90
  text "5V" at 2014,1965.97 h30 r90
  text "5V" at 3605,1959.99 h30 r90
  text "SCK" at 814,1935.98 h30 r90
  text "GND" at 1814,1935.98 h30 r90
  text "3V3" at 1914,1935.98 h30 r90
  text "SCK" at 2405,1930 h30 r90
  text "GND" at 3405,1930 h30 r90
  text "3V3" at 3505,1930 h30 r90
  text "MOSI" at 714,1915.99 h30 r90
  text "MISO" at 614,1910.99 h30 r90
  text "MOSI" at 2305,1910.01 h30 r90
  text "MISO" at 2205,1905.01 h30 r90
  text "ENC_A" at 1409,1876 h30 r90
  text "ENC_B" at 1509,1876 h30 r90
  text "ENC_N" at 1609,1876 h30 r90
  text "ENC_A" at 3000,1870.02 h30 r90
  text "ENC_B" at 3100,1870.02 h30 r90
  text "ENC_N" at 3200,1870.02 h30 r90
  text "CS0_DRV" at 919,1816 h30 r90
  text "CS2_DRV" at 2499,1810.04 h30 r90
  text "CS0_CTRL" at 1019,1786 h30 r90
  text "CS2_CTRL" at 2609,1780.05 h30 r90
  text "W" at 1014,306 h30 r90
  text "W" at 1114,306 h30 r90
  text "V" at 1214,306 h30 r90
  text "V" at 1314,306 h30 r90
  text "U" at 1414,306 h30 r90
  text "U" at 1514,306 h30 r90
  text "GND" at 1604,306 h30 r90
  text "GND" at 1704,306 h30 r90
  text "GND" at 1804,306 h30 r90
  text "VCC" at 1904,306 h30 r90
  text "VCC" at 2004,306 h30 r90
  text "W" at 2605,300.02 h30 r90
  text "W" at 2705,300.02 h30 r90
  text "V" at 2805,300.02 h30 r90
  text "V" at 2905,300.02 h30 r90
  text "U" at 3005,300.02 h30 r90
  text "U" at 3105,300.02 h30 r90
  text "GND" at 3195,300.02 h30 r90
  text "GND" at 3295,300.02 h30 r90
  text "GND" at 3395,300.02 h30 r90
  text "VCC" at 3495,300.02 h30 r90
  text "VCC" at 3595,300.02 h30 r90
  text "CTRL_EN" at 609,296 h30 r90
  text "CTRL_EN" at 2200,290.02 h30 r90
Bottom Overlay:
  lines w10: 3780,3270 4500,3270 4500,3870 3780,3870 3780,3270
  text "BOBBOB-V1.1 (William) / UBC Thunderbots /  / Designers: / Henry Bryant / Dannon Sturn / Liam Bontkes /  / December 19, 2021" at 4480,3280 h35
  text "CS1_CTRL" at 1519,2404 h30 r90
  text "CS1_DRV" at 1619,2404 h30 r90
  text "SCK" at 1724,2404 h30 r90
  text "MOSI" at 1824,2404 h30 r90
  text "CS3_CTRL" at 3109,2404 h30 r90
  text "CS3_DRV" at 3199,2404 h30 r90
  text "SCK" at 3314,2404 h30 r90
  text "MOSI" at 3414,2404 h30 r90
  text "5V" at 514,2394 h30 r90
  text "3V3" at 624,2394 h30 r90
  text "GND" at 724,2394 h30 r90
  text "ENC_N" at 929,2394 h30 r90
  text "ENC_B" at 1029,2394 h30 r90
  text "ENC_A" at 1119,2394 h30 r90
  text "MISO" at 1914,2394 h30 r90
  text "5V" at 2104,2394 h30 r90
  text "3V3" at 2214,2394 h30 r90
  text "GND" at 2314,2394 h30 r90
  text "ENC_N" at 2519,2394 h30 r90
  text "ENC_B" at 2619,2394 h30 r90
  text "ENC_A" at 2709,2394 h30 r90
  text "MISO" at 3504,2394 h30 r90
  text "CS4_CTRL" at 4729,1974 h30 r90
  text "CS4_DRV" at 4819,1974 h30 r90
  text "SCK" at 4934,1974 h30 r90
  text "MOSI" at 5034,1974 h30 r90
  text "5V" at 3724,1964 h30 r90
  text "3V3" at 3834,1964 h30 r90
  text "GND" at 3934,1964 h30 r90
  text "ENC_N" at 4139,1964 h30 r90
  text "ENC_B" at 4239,1964 h30 r90
  text "ENC_A" at 4329,1964 h30 r90
  text "MISO" at 5124,1964 h30 r90
  text "CTRL_EN" at 1929,504 h30 r90
  text "CTRL_EN" at 3519,504 h30 r90
  text "VCC" at 535,490 h30 r90
  text "VCC" at 635,490 h30 r90
  text "GND" at 735,490 h30 r90
  text "GND" at 835,490 h30 r90
  text "GND" at 935,490 h30 r90
  text "U" at 1025,490 h30 r90
  text "U" at 1125,490 h30 r90
  text "V" at 1225,490 h30 r90
  text "V" at 1325,490 h30 r90
  text "W" at 1425,490 h30 r90
  text "W" at 1525,490 h30 r90
  text "VCC" at 2125,490 h30 r90
  text "VCC" at 2225,490 h30 r90
  text "GND" at 2325,490 h30 r90
  text "GND" at 2425,490 h30 r90
  text "GND" at 2525,490 h30 r90
  text "U" at 2615,490 h30 r90
  text "U" at 2715,490 h30 r90
  text "V" at 2815,490 h30 r90
  text "V" at 2915,490 h30 r90
  text "W" at 3015,490 h30 r90
  text "W" at 3115,490 h30 r90
  text "GND" at 4076,64 h30 r180
  text "U" at 4235,60 h30 r90
  text "U" at 4335,60 h30 r90
  text "V" at 4435,60 h30 r90
  text "V" at 4535,60 h30 r90
  text "W" at 4635,60 h30 r90
  text "W" at 4735,60 h30 r90
  text "VCC" at 3734,36 h30
  text "VCC" at 3844,36 h30
  text "GND" at 3944,36 h30
  text "GND" at 4054,36 h30
  text "CTRL_EN" at 5214,31 h30
Mechanical 1:
  lines w7.87: -321.57,1084.08 -321.57,1399.04 -293.3,1404.24 -266.06,1413.49 -240.47,1426.6 -217.04,1443.33 -196.33,1463.29 -178.74,1486.05 -164.68,1511.09 -154.4,1537.98 -148.14,1566.05 -146.02,1594.71 -148.14,1623.41 -154.4,1651.48 -164.68,1678.33 -178.74,1703.41 -196.33,1726.17 -217.04,1746.13 -240.47,1762.82 -266.06,1775.97 -293.3,1785.22 -321.57,1790.42 -321.57,2921.01 -170.35,2922.78 -152.83,2924.75 -136.18,2930.57 -121.26,2939.94 -108.77,2952.43 -99.4,2967.35 -93.58,2984 -91.61,3001.52 -91.61,3276.44 1032.96,4401.01 1725.67,4401.01 1725.67,3622.35 3772.92,3622.35 3772.92,4401.01 4465.58,4401.01 5590.2,3276.44 5590.2,3001.52 5592.17,2984 5598,2967.35 5607.37,2952.43 5619.85,2939.94 5634.77,2930.57 5651.42,2924.75 5668.94,2922.78 5820.16,2921.01 5820.16,1790.42 5791.86,1785.22 5764.65,1775.97 5739.06,1762.86 5715.63,1746.13 5694.93,1726.17 5677.33,1703.41 5663.27,1678.33 5653,1651.48 5646.74,1623.41 5644.61,1594.71 5646.74,1566.05 5653,1537.98 5663.27,1511.09 5677.33,1486.05 5694.93,1463.29 5715.63,1443.33 5739.06,1426.6 5764.65,1413.49 5791.86,1404.24 5820.16,1399.04 5820.16,1084.08 5609.93,748.33 5060,-130 438.59,-130 -111.33,748.33 -321.57,1084.08 ; 0,0 0,3935 5510,3935 5510,0 0,0